# EAGLE board PCB v8 (EAGLE 9.7.0)
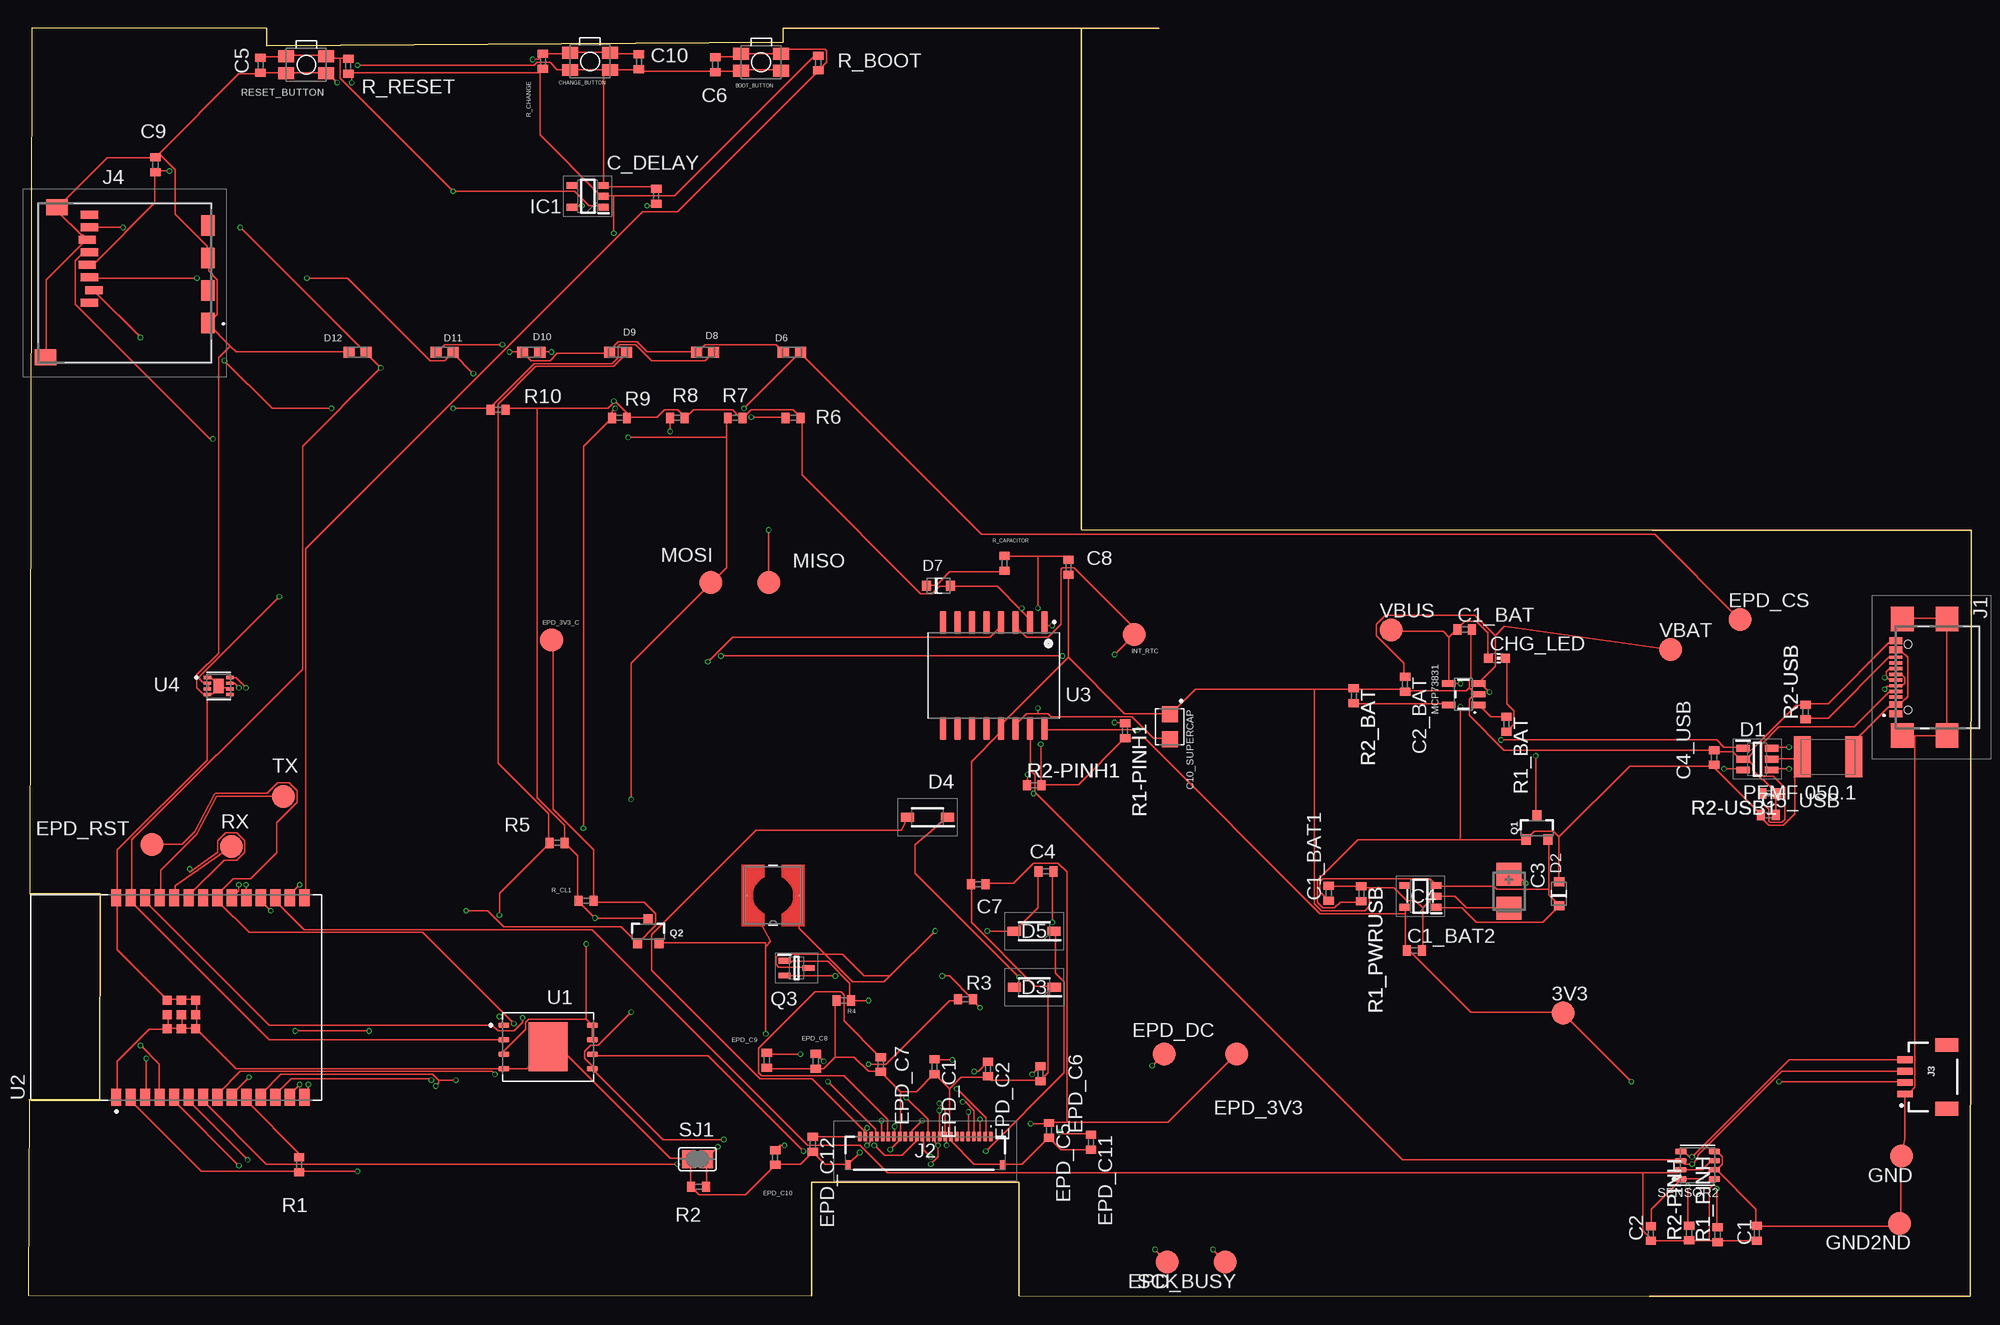
[diagram p0: board, top side]
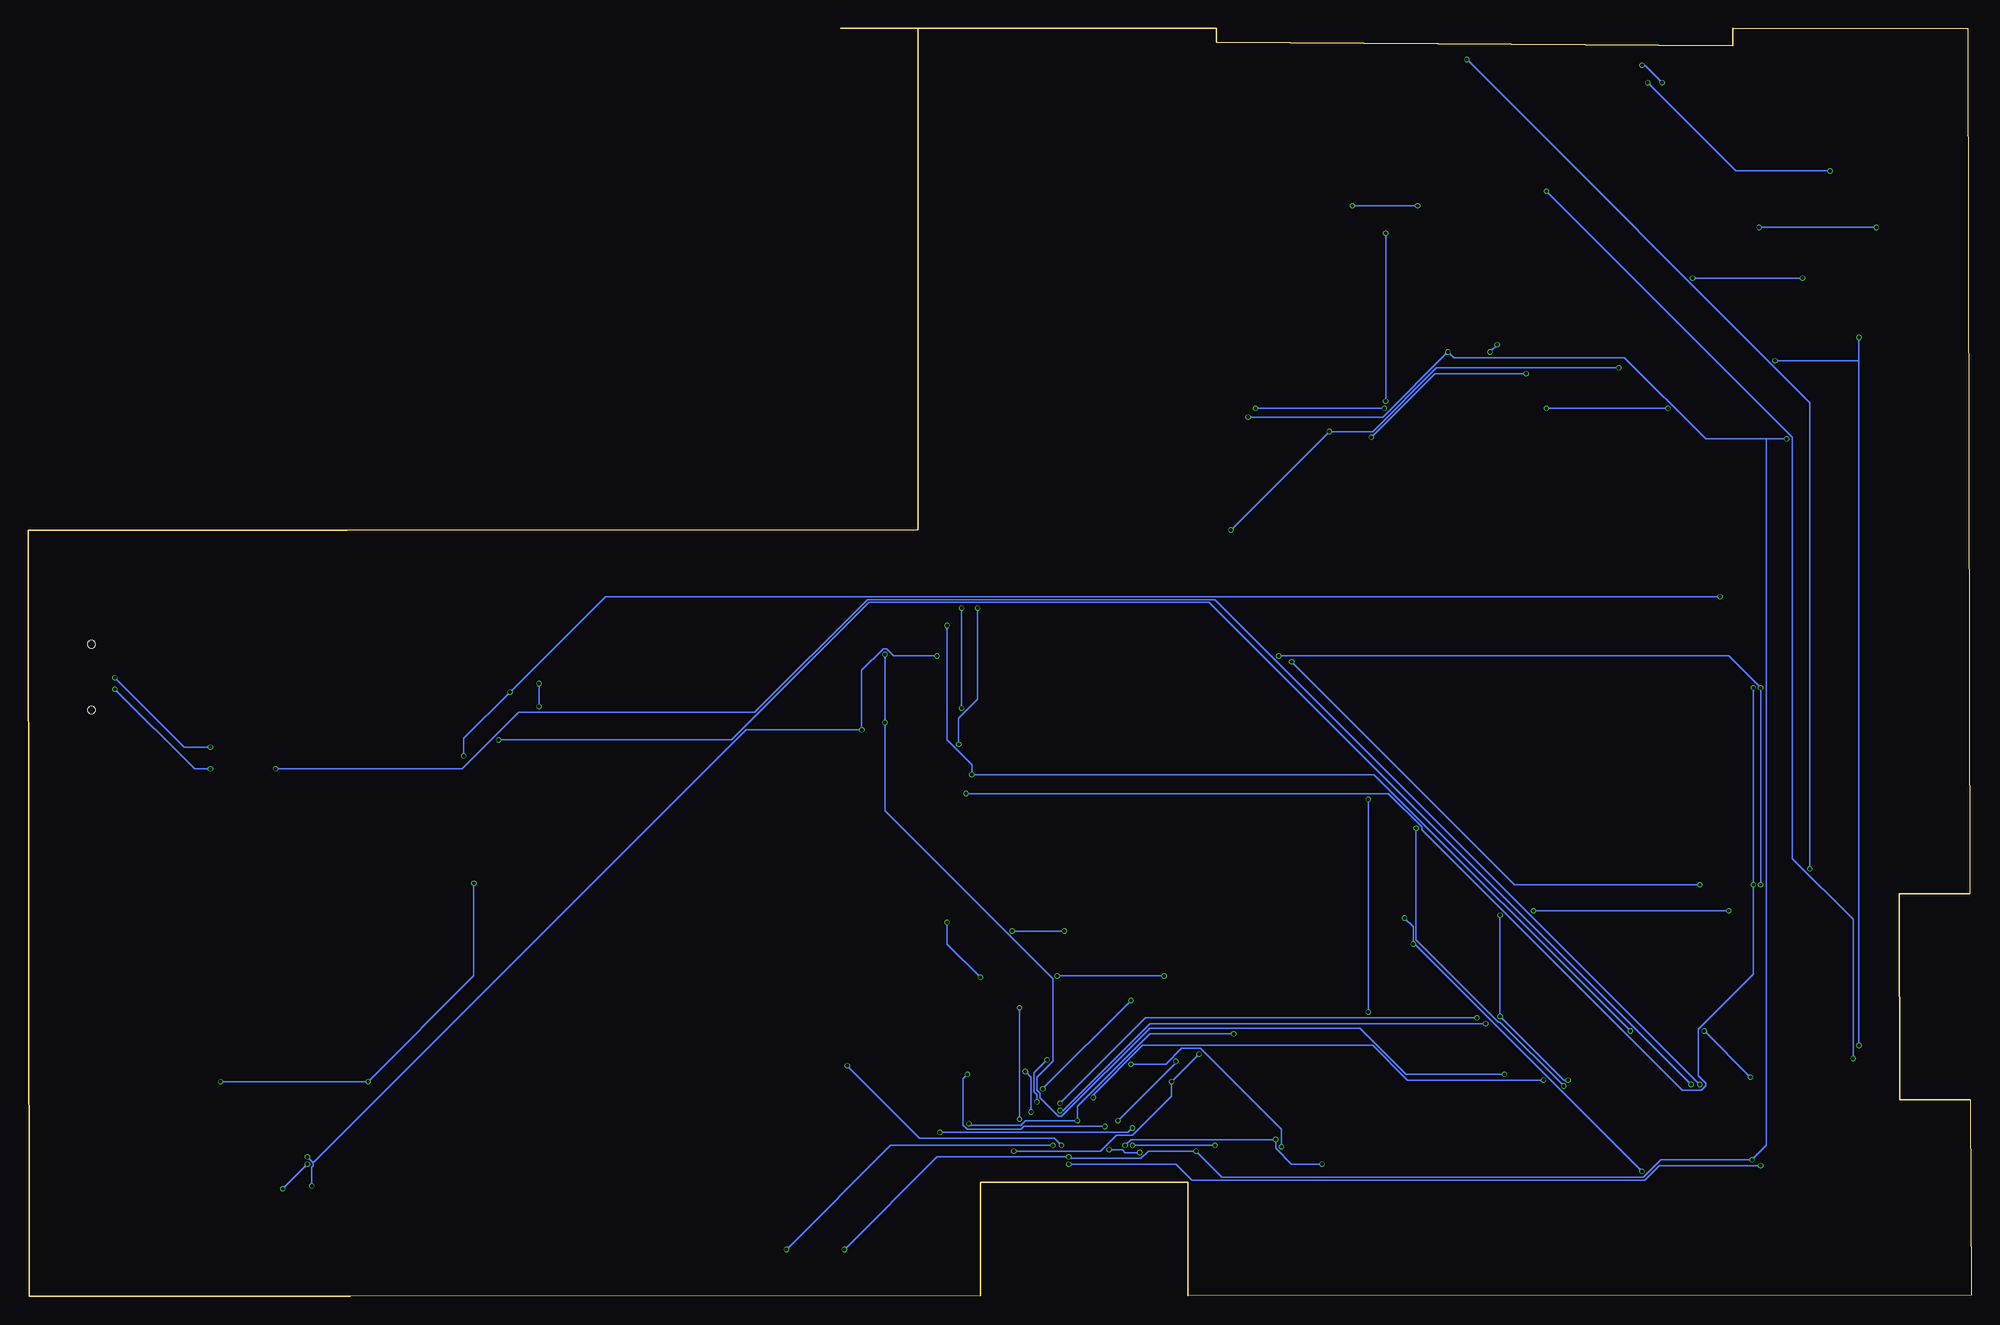
[diagram p1: board, bottom side, seen from below]

Size 170.44 x 111.2 mm. Coordinates in mm from the lower left corner, seen from the top.
Outline: 92.4,111.2 99.2,111.2
Outline: 92.4,111.2 66.2,111.2 66.2,110 20.9,109.7 20.9,111.2 0.3,111.2 0.1,35.31 6.28,35.3 6.23,17.23 0.05,17.25 0,0.1 68.72,0.05 68.72,10.01 69.08,10.01 86.9,10 86.89,0.04 142.2,0 170.39,0 170.44,67.2 142.5,67.17 92.4,67.24 92.4,68.7 92.4,111.2
Copper layers (1*16): Top / Bottom
Stack-up Default Layer Stack: Top User Defined 0.035mm / Dielectric-1 User Defined 1.6mm / Bottom User Defined 0.035mm
Design rules: minimum copper width 5mil, minimum drill size 0.3mm, copper clearance wire_polygon to wire_polygon 5mil, copper clearance wire_polygon to pad_smd 5mil, copper clearance wire_polygon to via 5mil, copper clearance pad_smd to pad_smd 5mil, copper clearance pad_smd to via 5mil, copper clearance via to via 5mil, copper clearance smd to pad (same net) 5mil, copper clearance smd to via (same net) 5mil, copper clearance smd to smd (same net) 5mil, dimension clearance 0.2mm, via restrict clearance 0mil, restrict clearance 0mil, drill distance 6mil, keepout clearance 0mil

## Footprints (pad centres in the part's own frame; a part is rotated, then mirrored left to right if it is on the bottom)
TP20R = smd 2 x 2: TP 0,0
MYBUTTON = smd 1.4 x 1.05: 1 1.75,0.75; 2 -1.75,0.75; 3 -1.75,-0.75; 4 1.75,-0.75
ESP32_WROVER_EAGLE-LTSPICE_C0402 = smd 0.7 x 0.9: 1 -0.65,0; 2 0.65,0
EAGLE-LTSPICE_C0402 = smd 0.7 x 0.9: 1 -0.65,0; 2 0.65,0
RCL_CT3528 = smd 2 x 2.2: + -1.5,0; - 1.5,0
CAPCP3225X100N = smd 1.4 x 1.4: 1 -1.1,0; 2 1.1,0
ADAFRUIT_CHIP-LED0603 = smd 0.8 x 0.8: A 0,-0.75; C 0,0.75
SOT95P280X145-6N = smd 1.2 x 0.6: 1 -1.25,0.95; 2 -1.25,0; 3 -1.25,-0.95; 4 1.25,-0.95; 5 1.25,0; 6 1.25,0.95
ESP32_WROVER_AVX---SD0805S020S1R0_AVX_SD0805S020S1R0_0 = smd 0.8 x 0.9: 1 -1.05,0; 2 1.05,0
SOD3716X135N = smd 1.15 x 0.8: 1 -1.75,0; 2 1.75,0
DIOC1608X36N = smd 0.97 x 0.94: 1 -0.75,0; 2 0.75,0
SOT95P280X125-5N = smd 0.9 x 0.6: 1 -1.4,0.95; 2 -1.4,0; 3 -1.4,-0.95; 4 1.4,-0.95; 5 1.4,0.95
SOT95P280X120-5N = smd 0.9 x 0.6: 1 -1.4,0.95; 2 -1.4,0; 3 -1.4,-0.95; 4 1.4,-0.95; 5 1.4,0.95
SAMACSYS_PARTS_USB4110GFA = smd 0.3 x 1.15: A1 -3.35,3.678; A4 -2.55,3.678; A5 -1.25,3.678; A6 -0.25,3.678; A7 0.25,3.678; A8 1.25,3.678; A9 2.55,3.678; A12 3.35,3.678; B1 3.05,3.678; B4 2.25,3.678; B5 1.75,3.678; B6 0.75,3.678; B7 -0.75,3.678; B8 -1.75,3.678; B9 -2.25,3.678; B12 -3.05,3.678 | smd 2.18 x 2: MP1 -5.11,-0.827; MP2 5.11,-0.827; MP3 -5.11,3.103; MP4 5.11,3.103 | hole 0.65: -2.89,2.603; 2.89,2.603
FH34SRJ24S05SH99 = smd 0.3 x 0.8: 1 5.75,1.45; 2 5.25,1.45; 3 4.75,1.45; 4 4.25,1.45; 5 3.75,1.45; 6 3.25,1.45; 7 2.75,1.45; 8 2.25,1.45; 9 1.75,1.45; 10 1.25,1.45; 11 0.75,1.45; 12 0.25,1.45; 13 -0.25,1.45; 14 -0.75,1.45; 15 -1.25,1.45; 16 -1.75,1.45; 17 -2.25,1.45; 18 -2.75,1.45; 19 -3.25,1.45; 20 -3.75,1.45; 21 -4.25,1.45; 22 -4.75,1.45; 23 -5.25,1.45; 24 -5.75,1.45 | smd 0.4 x 0.8: MP1 6.75,-1.05; MP2 -6.75,-1.05
JST04_1MM_RA = smd 0.6 x 1.35: 1 -1.5,0; 2 -0.5,0; 3 0.5,0; 4 1.5,0 | smd 1.2 x 2: NC1 2.8,-3.675; NC2 -2.8,-3.675
112ATAARR03ATTEND = smd 1.8 x 1.2: G1 10.6,10.4; G2 4.9,10.4; S1 7.75,10.4; S2 2.05,10.4 | smd 1.4 x 1.9: G3 13.6,-3.85; G4 0.45,-2.85 | smd 0.7 x 1.5: P1 8.8,0; P2 7.7,0.4; P3 6.6,0; P4 5.5,-0.2; P5 4.4,0; P6 3.3,-0.2; P7 2.2,0; P8 1.1,0
IND_4828-WE-TPC_WRE = smd 0.127 x 0.127: 1 -2.286,0; 2 2.286,0
ESP32_WROVER_SPARKFUN-IC-POWER_SOT23-5 = smd 0.55 x 1.2: 1 -0.95,-1.3; 2 0,-1.3; 3 0.95,-1.3; 4 0.95,1.3; 5 -0.95,1.3
ESP32C6_VARISTOR_CT/CN1812 = smd 1.5 x 3.6: 1 -2.25,0; 2 2.25,0
ESP32_WROVER_SPARKFUN-DISCRETESEMI_SOT23-3 = smd 0.8 x 0.9: 1 -0.95,-1; 2 0.95,-1; 3 0,1.1
SOT65P210X110-3N = smd 1.05 x 0.5: 1 -1.05,0.65; 2 -1.05,-0.65; 3 1.05,0
ESP32_WROVER_EAGLE-LTSPICE_R0402 = smd 0.7 x 0.9: 1 -0.65,0; 2 0.65,0
ESP32_WROVER_BME680_PSON80P300X300X100-8N = smd 1.016 x 0.5: 1 1.458,1.2; 2 1.458,0.4; 3 1.458,-0.4; 4 1.458,-1.2; 5 -1.458,-1.22; 6 -1.458,-0.4; 7 -1.458,0.4; 8 -1.458,1.2
SJ = smd 1.168 x 1.6: 1 -0.762,0; 2 0.762,0
SON127P600X800X80-9N = smd 0.94 x 0.44: 1 -3.895,1.905; 2 -3.895,0.635; 3 -3.895,-0.635; 4 -3.895,-1.905; 5 3.895,-1.905; 6 3.895,-0.635; 7 3.895,0.635; 8 3.895,1.905 | smd 3.4 x 4.3: 9 0,0
XCVR_ESP32-C6-WROOM-1-N8 = smd 1.5 x 0.9: 1 -8.75,5.26; 2 -8.75,3.99; 3 -8.75,2.72; 4 -8.75,1.45; 5 -8.75,0.18; 6 -8.75,-1.09; 7 -8.75,-2.36; 8 -8.75,-3.63; 9 -8.75,-4.9; 10 -8.75,-6.17; 11 -8.75,-7.44; 12 -8.75,-8.71; 13 -8.75,-9.98; 14 -8.75,-11.25; 15 8.75,-11.25; 16 8.75,-9.98; 17 8.75,-8.71; 18 8.75,-7.44; 19 8.75,-6.17; 20 8.75,-4.9; 21 8.75,-3.63; 22 8.75,-2.36; 23 8.75,-1.09; 24 8.75,0.18; 25 8.75,1.45; 26 8.75,2.72; 27 8.75,3.99; 28 8.75,5.26 | smd 0.8 x 0.8: 29_1 -2.755,0.79; 29_2 -1.505,0.79; 29_3 -0.255,0.79; 29_4 -2.755,-0.46; 29_5 -1.505,-0.46; 29_6 -0.255,-0.46; 29_7 -2.755,-1.71; 29_8 -1.505,-1.71; 29_9 -0.255,-1.71
SOIC127P1032X265-16N = smd 2.05 x 0.59: 1 -4.655,4.445; 2 -4.655,3.175; 3 -4.655,1.905; 4 -4.655,0.635; 5 -4.655,-0.635; 6 -4.655,-1.905; 7 -4.655,-3.175; 8 -4.655,-4.445; 9 4.655,-4.445; 10 4.655,-3.175; 11 4.655,-1.905; 12 4.655,-0.635; 13 4.655,0.635; 14 4.655,1.905; 15 4.655,3.175; 16 4.655,4.445
SON50P200X200X80-9N = smd 0.76 x 0.27: 1 -0.985,0.75; 2 -0.985,0.25; 3 -0.985,-0.25; 4 -0.985,-0.75; 5 0.985,-0.75; 6 0.985,-0.25; 7 0.985,0.25; 8 0.985,0.75 | smd 0.9 x 1.3: 9 0,0

## Placement (x,y rotation side)
3V3  TPTP20R  [TP20R]  134.65,24.84 0 top
BOOT_BUTTON  BUTTON_CUSYOMV1  [MYBUTTON]  64.29,108.23 180 top
C1  100nF  [ESP32_WROVER_EAGLE-LTSPICE_C0402]  151.64,5.52 90 top
C1_BAT  4.7uF  [EAGLE-LTSPICE_C0402]  126.01,58.48 0 top
C1_BAT1  4.7uF  [ESP32_WROVER_EAGLE-LTSPICE_C0402]  114.08,35.35 90 top
C1_BAT2  4.7uF  [ESP32_WROVER_EAGLE-LTSPICE_C0402]  121.59,30.32 0 top
C2  100nF  [ESP32_WROVER_EAGLE-LTSPICE_C0402]  142.34,5.5 90 top
C2_BAT  4.7uF  [EAGLE-LTSPICE_C0402]  120.78,53.68 270 top
C3  100uF TANT  [RCL_CT3528]  129.9,35.52 270 top
C4  4.7uF/25V  [ESP32_WROVER_EAGLE-LTSPICE_C0402]  89.28,37.26 180 top
C4_USB  100nf  [EAGLE-LTSPICE_C0402]  147.9,47.25 90 top
C5  1uF  [EAGLE-LTSPICE_C0402]  20.36,107.98 270 top
C5_USB  4.7uF  [EAGLE-LTSPICE_C0402]  152.66,42.2 0 top
C6  100nF  [EAGLE-LTSPICE_C0402]  60.26,108.02 270 top
C7  10uF  [ESP32_WROVER_EAGLE-LTSPICE_C0402]  83.33,36.14 180 top
C8  100nF  [EAGLE-LTSPICE_C0402]  91.26,63.94 270 top
C9  100nF  [EAGLE-LTSPICE_C0402]  11.14,99.24 90 top
C10  100nF  [EAGLE-LTSPICE_C0402]  53.56,108.28 270 top
C10_SUPERCAP  CPH3225A  [CAPCP3225X100N]  100.14,49.95 270 top
C_DELAY  100nF  [EAGLE-LTSPICE_C0402]  55.08,96.49 90 top
CHANGE_BUTTON  BUTTON_CUSYOMV1  [MYBUTTON]  49.27,108.31 180 top
CHG_LED  [ADAFRUIT_CHIP-LED0603]  128.85,55.96 270 top
D1  USBLC6-2SC6Y  [SOT95P280X145-6N]  151.68,47.1 0 top
D2  SD0805S020S1R0  [ESP32_WROVER_AVX---SD0805S020S1R0_AVX_SD0805S020S1R0_0]  134.29,35.29 90 top
D3  MBR0530  [SOD3716X135N]  88.25,27.1 180 top
D4  MBR0530  [SOD3716X135N]  78.88,42.02 180 top
D5  MBR0530  [SOD3716X135N]  88.24,32.02 180 top
D6  PGB1010603MR  [DIOC1608X36N]  66.98,82.8 0 top
D7  ESP32_WROVER_AVX---SD0805S020S1R0_AVX_SD0805S020S1R0_0_0AVX_SD0805S020S1R0_0_0  [ESP32_WROVER_AVX---SD0805S020S1R0_AVX_SD0805S020S1R0_0]  79.84,62.31 0 top
D8  PGB1010603MR  [DIOC1608X36N]  59.36,82.8 0 top
D9  PGB1010603MR  [DIOC1608X36N]  51.74,82.8 0 top
D10  PGB1010603MR  [DIOC1608X36N]  44.12,82.8 0 top
D11  PGB1010603MR  [DIOC1608X36N]  36.5,82.8 0 top
D12  PGB1010603MR  [DIOC1608X36N]  28.88,82.8 0 top
EPD_3V3  TPTP20R  [TP20R]  106,21.24 0 top
EPD_3V3_C  TPTP20R  [TP20R]  45.9,57.54 0 top
EPD_BUSY  TPTP20R  [TP20R]  104.99,2.98 180 top
EPD_C1  1uF/50V  [EAGLE-LTSPICE_C0402]  79.5,20.13 270 top
EPD_C2  1uF/50V  [EAGLE-LTSPICE_C0402]  84.2,19.92 270 top
EPD_C5  0.1uF/50V  [EAGLE-LTSPICE_C0402]  89.54,14.54 270 top
EPD_C6  1uF/50V  [EAGLE-LTSPICE_C0402]  88.8,19.51 270 top
EPD_C7  1uF/50V  [EAGLE-LTSPICE_C0402]  74.78,20.32 270 top
EPD_C8  1uF/50V  [EAGLE-LTSPICE_C0402]  69.08,20.61 270 top
EPD_C9  1uF/50V  [EAGLE-LTSPICE_C0402]  64.78,20.7 270 top
EPD_C10  1uF/50V  [EAGLE-LTSPICE_C0402]  65.52,12.17 270 top
EPD_C11  1uF/50V  [EAGLE-LTSPICE_C0402]  93.22,13.49 270 top
EPD_C12  1uF/50V  [EAGLE-LTSPICE_C0402]  68.82,13.33 270 top
EPD_CS  TPTP20R  [TP20R]  150.17,59.34 0 top
EPD_DC  TPTP20R  [TP20R]  99.65,21.24 0 top
EPD_RST  TPTP20R  [TP20R]  10.85,39.64 0 top
GND  TPTP20R  [TP20R]  164.33,12.28 180 top
GND2ND  TPTP20R  [TP20R]  164.17,6.38 180 top
IC1  BD5229G-TR  [SOT95P280X125-5N]  49.07,96.48 180 top
IC4  XC6220A331MR-G  [SOT95P280X120-5N]  122.13,35.08 180 top
INT_RTC  TPTP20R  [TP20R]  97,58.04 0 top
J1  SAMACSYS_PARTS_USB4110-GF-A  [SAMACSYS_PARTS_USB4110GFA]  167.51,54.29 90 top
J2  FH34SRJ-24S-0.5SH_99_  [FH34SRJ24S05SH99]  78.69,12.55 0 top
J3  QWIIC_RIGHT_ANGLE  [JST04_1MM_RA]  164.64,19.24 90 top
J4  112A-TAAR-R03_ATTEND  [112ATAARR03ATTEND]  5.35,95.96 270 top
L1  [IND_4828-WE-TPC_WRE]  65.33,35.15 180 top
MCP73831  MCP73831  [ESP32_WROVER_SPARKFUN-IC-POWER_SOT23-5]  125.91,52.8 90 top
MISO  TPTP20R  [TP20R]  64.95,62.62 0 top
MOSI  TPTP20R  [TP20R]  59.87,62.62 0 top
PFMF.050.1  PFMF.050.1  [ESP32C6_VARISTOR_CT/CN1812]  157.89,47.3 180 top
Q1  20V/4.2A/52mΩ/1.4W  [ESP32_WROVER_SPARKFUN-DISCRETESEMI_SOT23-3]  132.36,41.06 0 top
Q2  20V/4.2A/52mΩ/1.4W  [ESP32_WROVER_SPARKFUN-DISCRETESEMI_SOT23-3]  54.38,31.96 0 top
Q3  SI1308EDL-T1-GE3  [SOT65P210X110-3N]  67.39,28.78 0 top
R1  10K  [ESP32_WROVER_EAGLE-LTSPICE_R0402]  23.74,11.53 90 top
R1-PINH1  10k  [ESP32_WROVER_EAGLE-LTSPICE_R0402]  96.22,49.59 270 top
R1_BAT  200  [ESP32_WROVER_EAGLE-LTSPICE_R0402]  129.68,50.17 270 top
R1_PINH  10K  [ESP32_WROVER_EAGLE-LTSPICE_R0402]  148.2,5.38 90 top
R1_PWRUSB  100k  [ESP32_WROVER_EAGLE-LTSPICE_R0402]  116.94,35.29 270 top
R2  2.2  [ESP32_WROVER_EAGLE-LTSPICE_R0402]  58.8,9.6 180 top
R2-PINH  10k  [ESP32_WROVER_EAGLE-LTSPICE_R0402]  145.7,5.54 90 top
R2-PINH1  10k  [ESP32_WROVER_EAGLE-LTSPICE_R0402]  88.25,44.82 0 top
R2-USB  5K1  [ESP32_WROVER_EAGLE-LTSPICE_R0402]  155.92,51.25 90 top
R2-USB1  5K1  [ESP32_WROVER_EAGLE-LTSPICE_R0402]  152.78,44.1 180 top
R2_BAT  2K  [ESP32_WROVER_EAGLE-LTSPICE_R0402]  116.28,52.66 270 top
R3  0.47  [ESP32_WROVER_EAGLE-LTSPICE_R0402]  82.21,26.04 180 top
R4  10k  [ESP32_WROVER_EAGLE-LTSPICE_R0402]  71.53,25.94 180 top
R5  10k  [ESP32_WROVER_EAGLE-LTSPICE_R0402]  46.39,39.76 0 top
R6  10k  [ESP32_WROVER_EAGLE-LTSPICE_R0402]  67.09,77.04 0 top
R7  10k  [ESP32_WROVER_EAGLE-LTSPICE_R0402]  62.01,77.04 0 top
R8  10k  [ESP32_WROVER_EAGLE-LTSPICE_R0402]  56.93,77.04 0 top
R9  10k  [ESP32_WROVER_EAGLE-LTSPICE_R0402]  51.85,77.04 0 top
R10  10k  [ESP32_WROVER_EAGLE-LTSPICE_R0402]  41.21,77.76 0 top
R_BOOT  10k  [ESP32_WROVER_EAGLE-LTSPICE_R0402]  69.3,108.17 270 top
R_CAPACITOR  15  [ESP32_WROVER_EAGLE-LTSPICE_R0402]  85.64,64.29 270 top
R_CHANGE  10k  [ESP32_WROVER_EAGLE-LTSPICE_R0402]  45.14,108.32 270 top
R_CL1  10k  [ESP32_WROVER_EAGLE-LTSPICE_R0402]  48.93,34.68 0 top
R_RESET  10k  [ESP32_WROVER_EAGLE-LTSPICE_R0402]  28.06,107.9 90 top
RESET_BUTTON  BUTTON_CUSYOMV1  [MYBUTTON]  24.38,108.01 180 top
RX  TPTP20R  [TP20R]  17.79,39.44 0 top
SCK  TPTP20R  [TP20R]  99.91,2.98 180 top
SENSOR2  ESP32_WROVER_BME680_BME680  [ESP32_WROVER_BME680_PSON80P300X300X100-8N]  146.45,11.48 180 top
SJ1  [SJ]  58.7,12.02 0 top
TX  TPTP20R  [TP20R]  22.37,43.84 0 top
U1  W25Q512JVEIQ  [SON127P600X800X80-9N]  45.59,21.86 0 top
U2  ESP32-C6-WROOM-1-N8  [XCVR_ESP32-C6-WROOM-1-N8]  12.96,26.2 90 top
U3  DS3231SN#  [SOIC127P1032X265-16N]  84.7,54.45 270 top
U4  MAX17048G+T10  [SON50P200X200X80-9N]  16.69,53.52 0 top
VBAT  TPTP20R  [TP20R]  144.09,56.72 0 top
VBUS  TPTP20R  [TP20R]  119.55,58.44 0 top

## Library data of the parts
3V3 BOOT_BUTTON CHANGE_BUTTON CHG_LED EPD_3V3 EPD_3V3_C EPD_BUSY EPD_CS EPD_DC EPD_RST GND GND2ND INT_RTC MISO MOSI PFMF.050.1 RESET_BUTTON RX SCK SJ1 TX VBAT VBUS = DeskAssistant v19 v1
C1 C1_BAT C1_BAT1 C1_BAT2 C2 C2_BAT C4 C4_USB C5 C5_USB C6-C10 C_DELAY EPD_C1 EPD_C2 EPD_C5-EPD_C12 = DeskAssistant v19 v1; SPICEMODEL: NONE; SPICEPREFIX: C
C3 = DeskAssistant v19 v1; SPICEPREFIX: C
C10_SUPERCAP = DeskAssistant v19 v1; AVAILABILITY: Not in stock; CHECK_PRICES: https://www.snapeda.com/parts/CPH3225A/Seiko+Instruments/view-part/?ref=eda; DESCRIPTION: 11 mF (EDLC) Supercapacitor 3.3 V 1210 (3225 Metric) - -; MF: Seiko Instruments; MP: CPH3225A; PACKAGE: 1210 Seiko; PRICE: None; PURCHASE-URL: https://www.snapeda.com/api/url_track_click_mouser/?unipart_id=562593&manufacturer=Seiko Instruments&part_name=CPH3225A&search_term=None; SNAPEDA_LINK: https://www.snapeda.com/parts/CPH3225A/Seiko+Instruments/view-part/?ref=snap
D1 = DeskAssistant v19 v1; AVAILABILITY: In Stock; CHECK_PRICES: https://www.snapeda.com/parts/USBLC6-2SC6Y/STMicroelectronics/view-part/?ref=eda; DESCRIPTION: 17V Clamp 5A (8/20µs) Ipp Tvs Diode Surface Mount SOT-23-6; MF: STMicroelectronics; MP: USBLC6-2SC6Y; PACKAGE: SOT-23-6 STMicroelectronics; PRICE: None; SNAPEDA_LINK: https://www.snapeda.com/parts/USBLC6-2SC6Y/STMicroelectronics/view-part/?ref=snap
D2 D7 = DeskAssistant v19 v1; CENTROID_NOT_SPECIFIED: No; DATASHEET: http://datasheets.avx.com/schottky.pdf; DIGIKEY_DESCRIPTION: DIODE SCHOTTKY 20V 1A 0805; DIGIKEY_PART_NUMBER: 478-7800-1-ND; LEAD_FREE: yes; MF: AVX; MOUSER_PART_NUMBER: 581-SD0805S020S1R0; PACKAGE: 0805 (2012 metric); PREFIX: D; ROHS: yes; TEMPERATURE_RANGE_HIGH: +125°C; TEMPERATURE_RANGE_LOW: -55°C
D3-D5 = DeskAssistant v19 v1; AVAILABILITY: In Stock; CHECK_PRICES: https://www.snapeda.com/parts/MBR0530/Onsemi/view-part/?ref=eda; DESCRIPTION: Diode Schottky 30 V 500mA Surface Mount SOD-123; MF: ON Semiconductor; MP: MBR0530; PACKAGE: SOD-123-2 ON Semiconductor; PRICE: None; PURCHASE-URL: https://www.snapeda.com/api/url_track_click_mouser/?unipart_id=179458&manufacturer=ON Semiconductor&part_name=MBR0530&search_term=None; SNAPEDA_LINK: https://www.snapeda.com/parts/MBR0530/Onsemi/view-part/?ref=snap
D6 D8-D12 = DeskAssistant v19 v1; AVAILABILITY: In Stock; CHECK_PRICES: https://www.snapeda.com/parts/PGB1010603MR/Littelfuse/view-part/?ref=eda; DESCRIPTION: 150V (Typ) Clamp - Ipp Tvs Diode Surface Mount 0603 (1608 Metric); MF: Littelfuse Inc.; MP: PGB1010603MR; PACKAGE: 0603 Littelfuse Inc.; PRICE: None; PURCHASE-URL: https://www.snapeda.com/api/url_track_click_mouser/?unipart_id=5659453&manufacturer=Littelfuse Inc.&part_name=PGB1010603MR&search_term=None; SNAPEDA_LINK: https://www.snapeda.com/parts/PGB1010603MR/Littelfuse/view-part/?ref=snap
IC1 = DeskAssistant v19 v1; DESCRIPTION: Voltage Detector with Adjustable Delay Time: CMOS processes are utilized to develop high precision, low current consumption CMOS reset ICs that allow arbitrary setting of the delay time. The extensive lineup includes both Nch Open Drain and CMOS output types in a wide range of detection voltages (from 2.3V to 6.0V, in 0.1V steps), enabling selection of the ideal solution based on customer requirements. In addition, the entire series is of course both lead-free and RoHS-compliant.; HEIGHT: 1.25mm; MANUFACTURER_NAME: ROHM Semiconductor; MANUFACTURER_PART_NUMBER: BD5229G-TR; MOUSER_PART_NUMBER: 755-BD5229G-TR; MOUSER_PRICE-STOCK: https://www.mouser.co.uk/ProductDetail/ROHM-Semiconductor/BD5229G-TR?qs=4kLU8WoGk0vvnhrrYwdszw%3D%3D
IC4 = DeskAssistant v19 v1; DESCRIPTION: LDO Voltage Regulators; HEIGHT: 1.2mm; MANUFACTURER_NAME: Torex; MANUFACTURER_PART_NUMBER: XC6220A331MR-G; MOUSER_PART_NUMBER: 865-XC6220A331MR-G; MOUSER_PRICE-STOCK: https://www.mouser.co.uk/ProductDetail/Torex-Semiconductor/XC6220A331MR-G?qs=AsjdqWjXhJ8ZSWznL1J0gg%3D%3D
J1 = DeskAssistant v19 v1; DESCRIPTION: CONN USB 2.0 TYPE-C R/A SMT; HEIGHT: 3.26mm; MANUFACTURER_NAME: GCT (GLOBAL CONNECTOR TECHNOLOGY); MANUFACTURER_PART_NUMBER: USB4110-GF-A; MOUSER_PART_NUMBER: 640-USB4110-GF-A; MOUSER_PRICE-STOCK: https://www.mouser.co.uk/ProductDetail/GCT/USB4110-GF-A?qs=KUoIvG%2F9IlYiZvIXQjyJeA%3D%3D
J2 = DeskAssistant v19 v1; DESCRIPTION: 24 Position FFC, FPC Connector Contacts, Top and Bottom 0.020" (0.50mm) Surface Mount, Right Angle; HEIGHT: 1.1mm; MANUFACTURER_NAME: Hirose; MANUFACTURER_PART_NUMBER: FH34SRJ-24S-0.5SH(99); MOUSER_PART_NUMBER: 798-FH34SRJ24S05SH99; MOUSER_PRICE-STOCK: https://www.mouser.co.uk/ProductDetail/Hirose-Connector/FH34SRJ-24S-0.5SH99?qs=vcbW%252B4%252BSTIpKBl5ap9J8Fw%3D%3D
J3 = DeskAssistant v19 v1; PROD_ID: CONN-13694
J4 = DeskAssistant v19 v1; DESCRIPTION: Micro SD Card Socket, Push-Push Type, Top Mount, SMT, H=1.83mm, 10u; HEIGHT: 1.9mm; MANUFACTURER_NAME: ATTEND; MANUFACTURER_PART_NUMBER: 112A-TAAR-R03 ATTEND
L1 = DeskAssistant v19 v1; COPYRIGHT: Copyright (C) 2024 Ultra Librarian. All rights reserved.; MANUFACTURER_PART_NUMBER: 744043680; MFR_NAME: Wurth Electronics
MCP73831 = DeskAssistant v19 v1; PROD_ID: IC-09995
Q1 Q2 = DeskAssistant v19 v1; PROD_ID: TRAN-14388
Q3 = DeskAssistant v19 v1; AVAILABILITY: In Stock; CHECK_PRICES: https://www.snapeda.com/parts/SI1308EDL-T1-GE3/Vishay+Siliconix/view-part/?ref=eda; DESCRIPTION: Si1308EDL-T1-GE3 N-channel MOSFET Transistor, 1.5 A, 30 V, 3-Pin SC-70 | Siliconix / Vishay SI1308EDL-T1-GE3; MF: Vishay Siliconix; MP: SI1308EDL-T1-GE3; PACKAGE: SOT-323 Vishay Semiconductor; PRICE: None; PURCHASE-URL: https://www.snapeda.com/api/url_track_click_mouser/?unipart_id=274603&manufacturer=Vishay Siliconix&part_name=SI1308EDL-T1-GE3&search_term=None; SNAPEDA_LINK: https://www.snapeda.com/parts/SI1308EDL-T1-GE3/Vishay+Siliconix/view-part/?ref=snap
R1 R1-PINH1 R1_BAT R1_PINH R1_PWRUSB R2 R2-PINH R2-PINH1 R2-USB R2-USB1 R2_BAT R3-R10 R_BOOT R_CAPACITOR R_CHANGE R_CL1 R_RESET = DeskAssistant v19 v1; SPICEMODEL: NONE; SPICEPREFIX: R
SENSOR2 = DeskAssistant v19 v1; AVAILABILITY: Unavailable; DESCRIPTION: Integrated Environmental Unit; MF: Bosch Sensortec; MP: BME680; PACKAGE: LGA-8 Bosch Tools; PRICE: None
U1 = DeskAssistant v19 v1; AVAILABILITY: In Stock; CHECK_PRICES: https://www.snapeda.com/parts/W25Q512JVEIQ/Winbond+Electronics/view-part/?ref=eda; DESCRIPTION: FLASH - NOR Memory IC 512Mb (64M x 8) SPI - Quad I/O 133 MHz 8-WSON (8x6); MF: Winbond Electronics; MP: W25Q512JVEIQ; PACKAGE: Package; PRICE: None; SNAPEDA_LINK: https://www.snapeda.com/parts/W25Q512JVEIQ/Winbond+Electronics/view-part/?ref=snap
U2 = DeskAssistant v19 v1; AVAILABILITY: In Stock; CHECK_PRICES: https://www.snapeda.com/parts/ESP32-C6-WROOM-1-N8/Espressif+Systems/view-part/?ref=eda; DESCRIPTION: Multiprotocol Modules ESP32-C6 module, Wi-Fi 6 in 2.4 GHz band, Bluetooth 5, Zigbee 3.0 and Thread. ESP34-WROOM Compatible - ENGINEERING SAMPLE; MF: Espressif Systems; MP: ESP32-C6-WROOM-1-N8; PACKAGE: None; PRICE: None; SNAPEDA_LINK: https://www.snapeda.com/parts/ESP32-C6-WROOM-1-N8/Espressif+Systems/view-part/?ref=snap
U3 = DeskAssistant v19 v1; AVAILABILITY: In Stock; CHECK_PRICES: https://www.snapeda.com/parts/DS3231SN%23/Analog+Devices/view-part/?ref=eda; DESCRIPTION: Extremely Accurate I²C-Integrated RTC/TCXO/Crystal; MF: Analog Devices; MP: DS3231SN#; PACKAGE: SOIC-16 Maxim; PRICE: None; PURCHASE-URL: https://www.snapeda.com/api/url_track_click_mouser/?unipart_id=99048&manufacturer=Analog Devices&part_name=DS3231SN#&search_term=None; SNAPEDA_LINK: https://www.snapeda.com/parts/DS3231SN%23/Analog+Devices/view-part/?ref=snap
U4 = DeskAssistant v19 v1; AVAILABILITY: In Stock; CHECK_PRICES: https://www.snapeda.com/parts/MAX17048G+T10/Analog+Devices/view-part/?ref=eda; DESCRIPTION: 3µA 1-Cell/2-Cell Fuel Gauge with ModelGauge; MF: Analog Devices; MP: MAX17048G+T10; PACKAGE: TDFN-8 Maxim; PRICE: None; PURCHASE-URL: https://www.snapeda.com/api/url_track_click_mouser/?unipart_id=329239&manufacturer=Analog Devices&part_name=MAX17048G+T10&search_term=None; SNAPEDA_LINK: https://www.snapeda.com/parts/MAX17048G+T10/Analog+Devices/view-part/?ref=snap

## Nets
3V3: 3V3.TP C1_BAT2.1 C3.+ C9.1 D7.2 IC1.2 IC4.5 J3.2 J4.P4 Q2.3 R1-PINH1.2 R1.1 R2-PINH1.2 R5.2 R6.2 R7.2 R8.2 R9.2 R10.2 R_BOOT.1 R_CHANGE.2 R_CL1.1 R_RESET.1 U1.3 U1.7 U1.8 U2.2 U3.2
32KHZ: R2-PINH1.1 U2.9 U3.1
DN: D1.4 J1.A7 J1.B7
DP: D1.6 J1.A6 J1.B6
EPD_3V3: C7.1 EPD_3V3.TP EPD_C5.1 J2.15 J2.16 L1.2 Q2.2
EPD_3V3_C: EPD_3V3_C.TP Q2.1 R_CL1.2 U2.18
EPD_BUSY: EPD_BUSY.TP J2.9 U2.26
EPD_CS: D6.2 EPD_CS.TP J2.12 R9.1 U2.11
EPD_DC: EPD_DC.TP J2.11 U2.5
EPD_RST: EPD_RST.TP J2.10 U2.21
FLASH_CS: D9.2 R5.1 U1.1 U2.12
GDR: J2.2 Q3.1 R4.1
GND: BOOT_BUTTON.1 BOOT_BUTTON.2 C1.2 C1_BAT1.2 C1_BAT2.2 C1_BAT.2 C2.2 C2_BAT.2 C3.- C4_USB.2 C5.2 C5_USB.2 C6.2 C7.2 C8.2 C9.2 C10.2 C10_SUPERCAP.1 C_DELAY.2 CHANGE_BUTTON.1 CHANGE_BUTTON.2 D1.2 D3.1 D12.1 EPD_C1.2 EPD_C2.2 EPD_C5.2 EPD_C6.2 EPD_C7.2 EPD_C8.2 EPD_C9.2 EPD_C10.2 EPD_C11.2 EPD_C12.2 GND2ND.TP GND.TP IC1.3 IC4.2 J1.A1 J1.A12 J1.B1 J1.B12 J1.MP1 J1.MP2 J1.MP3 J1.MP4 J2.8 J2.17 J2.MP1 J2.MP2 J3.1 J4.G1 J4.G2 J4.G3 J4.G4 J4.P6 MCP73831.2 R1_PWRUSB.1 R2-USB1.1 R2-USB.2 R2.2 R2_BAT.1 R4.2 RESET_BUTTON.1 RESET_BUTTON.2 SENSOR2.1 SENSOR2.5 SENSOR2.7 SJ1.1 U1.4 U1.9 U2.1 U2.28 U2.29_1 U2.29_2 U2.29_3 U2.29_4 U2.29_5 U2.29_6 U2.29_7 U2.29_8 U2.29_9 U3.13 U4.1 U4.4 U4.6 U4.9
GPIO8: R1.2 U2.10
I2C_PW: C1.1 C2.1 R1_PINH.1 R2-PINH.1 SENSOR2.2 SENSOR2.6 SENSOR2.8 U2.17
INT_RTC: INT_RTC.TP R1-PINH1.1 U2.8 U3.3
IO/BOOT: BOOT_BUTTON.3 BOOT_BUTTON.4 C6.1 R_BOOT.2 U2.15
IO/CHANGE: C10.1 CHANGE_BUTTON.3 CHANGE_BUTTON.4 R_CHANGE.1 U2.23
MISO: D12.2 J4.P7 MISO.TP R8.1 U1.2 U2.27
MOSI: D11.2 J2.14 J4.P3 MOSI.TP R7.1 U1.5 U2.7
N$1: C_DELAY.1 IC1.5
N$3: C1_BAT1.1 D2.1 IC4.1 IC4.3 Q1.2
N$4: D6.1 D8.1 D9.1 D10.1 D11.1
N$6: J1.A5 R2-USB1.2
N$8: J1.B5 R2-USB.1
N$15: EPD_C1.1 J2.4
N$16: D7.1 R_CAPACITOR.2
N$19: EPD_C2.1 J2.5
N$28: EPD_C6.1 J2.18
N$29: EPD_C8.1 J2.20
N$30: EPD_C7.1 J2.19
N$32: EPD_C10.1 J2.22
N$34: EPD_C12.1 J2.24
N$35: C4.1 D3.2 D4.1
N$36: CHG_LED.C R1_BAT.2
N$37: MCP73831.1 R1_BAT.1
N$38: MCP73831.5 R2_BAT.2
PREVGH: D5.1 EPD_C9.1 J2.21
PREVGL: D4.2 EPD_C11.1 J2.23
RESE: J2.3 Q3.2 R3.1
RESE': R2.1 R3.2 SJ1.2
RESET: C5.1 IC1.1 R_RESET.2 RESET_BUTTON.3 RESET_BUTTON.4 U2.3
RTC_RST: U2.16 U3.4
RX: RX.TP U2.24
SCK: D10.2 J2.13 J4.P5 R6.1 SCK.TP U1.6 U2.6
SCL: J3.4 R2-PINH.2 SENSOR2.4 U2.20 U3.16 U4.7
SDA: J3.3 R1_PINH.2 SENSOR2.3 U2.19 U3.15 U4.8
SRC: C4.2 D5.2 L1.1 Q3.3
SS_SD: D8.2 J4.P2 R10.1 U2.4
TX: TX.TP U2.25
USB_D+: D1.1 U2.14
USB_D-: D1.3 U2.13
VBAT: C2_BAT.1 MCP73831.3 Q1.3 U4.2 U4.3 VBAT.TP
VBUS: C1_BAT.1 C4_USB.1 C5_USB.1 CHG_LED.A D1.5 D2.2 MCP73831.4 PFMF.050.1.2 Q1.1 R1_PWRUSB.2 VBUS.TP
VRTC: C8.1 C10_SUPERCAP.2 R_CAPACITOR.1 U3.14
VUSB: J1.A4 J1.A9 J1.B4 J1.B9 PFMF.050.1.1

## Tracks (layer width: path | path; a pad name or v marks a point on that pad's centre or on a via)
3V3  (via drill 0.3)
  Top 0.127: 120.82,33.55 120.82,34.06 IC4.5 | 120.82,33.55 120.82,30.38 C1_BAT2.1 120.95,30.25 121.2,30.25 126.54,24.92 134.54,24.92 3V3.TP 134.67,24.79 v140.64,18.82 | v153.59,18.82 164.51,18.82 J3.2 | v131.36,36.22 130.6,36.98 129.97,36.98 C3.+ | 120.82,33.55 113.33,33.55 97.96,48.92 96.31,48.92 R1-PINH1.2 96.19,48.92 92.12,44.86 88.95,44.86 R2-PINH1.2 88.82,44.86 v88.82,48.41 | J4.P4 5.25,90.58 5.76,90.58 11.1,95.91 11.1,98.58 C9.1 11.22,98.7 v12.37,98.7 | 44.88,107.34 28.37,107.34 | 28.37,107.34 28.11,107.34 R_RESET.1 28.37,107.34 | 44.88,107.34 45.13,107.59 R_CHANGE.2 44.88,107.34 | 44.88,107.34 44.88,101.88 50.21,96.54 50.46,96.54 IC1.2 50.59,96.54 51.35,96.54 | 51.35,96.54 56.69,96.54 68.88,108.74 69.26,108.74 R_BOOT.1 | 28.37,107.34 v28.37,106.45 | 87.04,60.22 87.8,59.46 87.8,59.21 U3.2 | 87.04,60.22 85.01,62.25 80.94,62.25 D7.2 80.82,62.25 79.93,62.25 79.29,61.62 78.28,61.62 67.86,72.03 67.86,76.99 R6.2 67.74,77.11 67.1,77.75 63.42,77.75 62.78,77.11 R7.2 62.66,77.11 62.4,77.11 61.77,77.75 58.34,77.75 57.7,77.11 R8.2 57.58,77.11 56.94,77.75 55.8,77.75 55.16,77.11 52.62,77.11 R9.2 52.5,77.11 52.5,77.49 51.61,78.38 51.35,78.38 | 44.62,77.88 50.85,77.88 51.35,78.38 | 44.62,77.88 41.96,77.88 R10.2 | U2.2 9.06,17.42 9.06,17.04 15.16,10.95 23.67,10.95 R1.1 23.8,10.95 v28.88,10.95 | 48.94,24.28 43.86,24.28 43.61,24.03 43.61,23.39 41.7,21.49 41.7,21.23 U1.3 | 48.94,24.28 49.45,23.77 U1.8 49.45,23.65 49.45,22.5 U1.7 | Q2.3 54.27,33.17 v49.7,33.17 48.31,34.57 R_CL1.1 48.18,34.7 48.18,38.63 47.16,39.65 R5.2 47.04,39.77 47.04,41.3 44.62,43.71 44.62,77.88
  Top 0.127: v48.94,30.88 48.94,24.28 | v51.35,93.24 51.35,96.54 | 51.35,78.38 v51.35,78.51 | 87.04,60.22 v87.17,60.35
  Bottom 0.127: v153.59,18.82 v140.64,18.82 131.36,28.09 v131.36,36.22 | v12.37,98.7 20.62,98.7 v28.37,106.45 | 48.94,31.01 48.94,32.41 v49.7,33.17 | 48.94,31.01 v28.88,10.95 | 48.94,31.01 v48.94,30.88 | v51.35,78.51 v51.35,93.24 | v88.82,48.41 88.82,50.7 87.17,52.35 v87.17,60.35
32KHZ  (via drill 0.3)
  Top 0.127: v87.68,45.74 87.68,44.86 R2-PINH1.1 | v89.83,58.83 89.45,58.83 89.2,59.08 U3.1 | v19.35,19.2 17.95,17.8 17.95,17.55 U2.9 | v29.89,23.27 v23.41,23.27
  Bottom 0.127: v89.83,58.83 89.83,48.79 87.68,46.63 v87.68,45.74 52.37,45.74 v29.89,23.27 | v23.41,23.27 v19.35,19.2
DN  (via drill 0.3)
  Top 0.127: J1.A7 163.88,54.51 164.38,54.51 164.64,54.25 164.64,53.75 164.51,53.62 163.88,53.62 J1.B7 163.75,53.49 163.11,53.49 v162.86,53.24 | v154.48,46.25 152.95,46.25 D1.4
  Bottom 0.127: v154.48,46.25 155.88,46.25 v162.86,53.24
DP  (via drill 0.3)
  Top 0.127: 162.99,54.38 163.24,54.13 163.75,54.13 J1.A6 | 162.99,54.38 162.99,54.76 163.24,55.02 163.75,55.02 J1.B6 | v154.48,48.16 152.95,48.16 D1.6 | 162.99,54.38 v162.86,54.25
  Bottom 0.127: v154.48,48.16 156.76,48.16 v162.86,54.25
EPD_3V3  (via drill 0.3)
  Top 0.127: Q2.2 55.42,31.01 64.69,31.01 64.69,30.7 v64.69,23.01 | 65.13,31.11 63.04,34.89 L1.2 | J2.16 77.01,13.99 77.39,13.99 J2.15 77.52,14.12 77.52,14.5 v78.41,15.39 | 91.11,15.26 99.99,15.26 105.96,21.23 EPD_3V3.TP | 91.11,15.26 89.58,15.26 EPD_C5.1 89.45,15.14 v87.93,15.14 | 91.11,15.26 91.11,37.23 90.34,38 88.18,38 86.41,36.22 83.99,36.22 C7.1
  Top 0.152: 65.13,31.11 64.72,30.7 64.69,30.7
  Bottom 0.127: v87.93,15.14 87.8,15.01 83.36,15.01 82.98,15.39 v78.41,15.39 78.41,16.66 72.05,23.01 v64.69,23.01
EPD_3V3_C  (via drill 0.3)
  Top 0.127: v21.25,33.81 20.49,34.57 20.49,34.95 U2.18 | v38.4,33.81 40.3,33.81 41.7,32.41 51.99,32.41 53.39,31.01 Q2.1 53.51,31.01 55.04,32.54 55.04,33.55 54.02,34.57 49.7,34.57 R_CL1.2 49.58,34.7 49.58,39.14 46.02,42.7 46.02,57.43 EPD_3V3_C.TP
  Bottom 0.127: v38.4,33.81 v21.25,33.81
EPD_BUSY  (via drill 0.3)
  Top 0.127: v80.56,13.23 80.56,13.99 J2.9 80.44,14.12 80.44,16.41 v79.93,16.91 | v103.93,4.09 104.95,3.07 EPD_BUSY.TP | v43.35,24.41 43.35,24.03 42.59,23.27 41.19,23.27 40.69,23.77 21.13,23.77 10.33,34.57 10.33,34.95 U2.26
  Bottom 0.127: v80.56,13.23 94.79,13.23 v103.93,4.09 | v43.35,24.41 72.44,24.41 v79.93,16.91
EPD_CS  (via drill 0.3)
  Top 0.127: v77.01,17.42 78.91,15.52 78.91,14.12 J2.12 | 35.99,18.95 v37.51,18.95 | 35.99,18.95 35.48,19.45 22.14,19.45 20.49,17.8 20.49,17.55 U2.11 | v51.48,77.88 51.23,77.62 51.23,77.11 R9.1 51.1,76.99 48.69,74.57 v48.69,41.05 | v62.78,77.88 67.61,82.7 D6.2 67.74,82.7 83.61,66.83 142.69,66.83 EPD_CS.TP | 35.99,18.95 35.99,18.69 v35.73,18.44
  Bottom 0.127: v77.01,17.42 77.01,17.68 72.69,21.99 52.5,21.99 49.45,18.95 v37.51,18.95 | v62.78,77.88 v51.48,77.88 | v35.73,18.44 41.32,24.03 41.45,24.03 48.69,31.27 v48.69,41.05
EPD_DC  (via drill 0.3)
  Top 0.127: v98.6,20.22 99.61,21.23 EPD_DC.TP | J2.11 79.55,13.99 79.55,13.49 v79.8,13.23 79.8,12.22 v79.17,11.58 | v18.46,11.45 12.87,17.04 12.87,17.42 U2.5
  Bottom 0.127: v79.8,13.23 80.44,13.87 92.25,13.87 v98.6,20.22 | v18.46,11.45 27.35,11.45 28.62,10.18 68.37,10.18 69.77,11.58 v79.17,11.58
EPD_RST  (via drill 0.3)
  Top 0.127: v79.93,16.28 79.93,14.12 J2.10 | v42.59,23.9 34.59,31.9 19.35,31.9 16.68,34.57 16.68,34.95 U2.21 16.68,35.08 16.68,35.33 17.95,36.6 19.48,36.6 21.76,38.89 21.76,41.55 23.56,43.35 23.56,44.33 22.86,45.03 21.88,45.03 20.96,44.11 16.41,44.11 16.36,44.06 16.32,44.05 16.29,43.99 16.24,43.94 16.24,43.9 14.59,40.73 13.51,39.65 10.97,39.65 EPD_RST.TP
  Bottom 0.127: v79.93,16.28 79.67,16.28 72.05,23.9 v42.59,23.9
FLASH_CS  (via drill 0.3)
  Top 0.127: D9.2 52.5,82.7 51.35,81.56 44.5,81.56 41.19,78.26 41.19,46.76 45.64,42.31 45.64,39.77 R5.1 45.64,39.65 41.32,35.33 v41.32,33.42 | v41.32,24.54 41.57,24.28 41.57,23.77 U1.1 | v35.35,18.95 35.22,19.07 23.03,19.07 21.76,17.8 21.76,17.55 U2.12
  Bottom 0.127: v41.32,33.42 v41.32,24.54 35.73,18.95 v35.35,18.95
GDR  (via drill 0.3)
  Top 0.127: v81.45,18.18 83.99,15.64 83.99,14.12 J2.2 | v73.71,25.93 R4.1 72.05,26.06 72.05,27.46 70.15,29.36 66.34,29.36 Q3.1
  Bottom 0.127: v73.71,25.93 v81.45,18.18
GND  (via drill 0.3)
  Top 0.127: 89.45,27.2 89.96,27.2 D3.1 89.45,27.2 | 89.45,27.2 88.31,27.2 82.72,32.79 82.72,36.09 C7.2 82.72,36.22 82.72,46.89 85.26,49.43 85.26,49.68 U3.13 85.39,49.81 85.39,50.19 91.23,56.03 | EPD_C9.2 64.82,19.96 69.01,19.96 EPD_C8.2 69.13,19.96 69.77,19.96 70.78,20.98 | 70.78,20.98 70.78,25.93 R4.2 | EPD_C11.2 93.14,12.85 90.6,12.85 89.58,13.87 EPD_C5.2 89.45,13.87 87.17,11.58 85.52,11.58 J2.MP1 85.39,11.58 82.98,11.58 80.94,13.61 J2.8 80.82,14.12 80.82,18.18 | 76.5,17.93 76.5,14.12 J2.17 76.37,13.99 76.37,13.61 v75.61,12.85 | 76.5,17.93 74.85,19.58 EPD_C7.2 74.72,19.71 73.71,19.71 72.44,20.98 70.78,20.98 | 80.82,18.18 79.55,19.45 EPD_C1.2 79.42,19.45 77.9,17.93 76.5,17.93 | 80.82,18.18 81.83,19.2 84.12,19.2 EPD_C2.2 84.25,19.2 84.5,18.95 88.69,18.95 EPD_C6.2 88.82,18.95 89.45,19.58 89.45,27.2 | C2.2 142.41,6.25 142.41,7.64 144.95,10.18 SENSOR2.1 145.08,10.31 146.86,10.31 147.62,11.07 147.87,11.07 SENSOR2.7 | 148.13,11.07 148,11.2 SENSOR2.7 | 148.13,11.07 151.56,7.64 151.56,6.25 C1.2 151.68,6.12 164.11,6.12 GND2ND.TP 164.28,6.45 164.28,12.16 GND.TP 164.64,13.77 164.64,17.68 J3.1 164.64,17.8 165.02,17.8 165.53,18.31 165.53,49.17 | 148.13,11.07 148.64,11.58 148.64,12.22 148.26,12.6 148,12.6 SENSOR2.5 | 148.13,11.07 SENSOR2.7 | C5_USB.2 153.34,42.31 153.34,44.09 R2-USB1.1 153.34,44.22 152.19,45.36 152.06,45.36 151.3,46.12 151.3,46.63 150.8,47.14 | D1.2 150.41,47.14 150.16,47.14 149.53,47.78 148,47.78 C4_USB.2 147.87,47.9 129.46,47.9 126.41,50.95 126.41,52.35 126.92,52.86 | 150.8,47.14 151.3,47.65 151.3,48.03 155.11,51.84 155.88,51.84 R2-USB.2 156,51.97 157.91,51.97 163.24,57.3 163.75,57.3 J1.B1 163.88,57.43 163.88,57.55 J1.A12 163.88,57.68 163.88,58.83 164.38,59.33 J1.MP4 164.51,59.46 168.32,59.46 J1.MP2 168.32,59.33 168.32,49.3 J1.MP1 168.32,49.17 165.53,49.17
  Top 0.127: 150.8,47.14 150.54,47.14 D1.2 | 150.8,47.14 D1.2 | J1.B12 163.88,51.2 163.88,50.95 J1.A1 163.88,50.82 163.88,49.81 164.38,49.3 J1.MP3 164.51,49.17 165.53,49.17 | C1_BAT1.2 114.09,35.97 116.89,35.97 R1_PWRUSB.1 117.01,35.84 117.65,35.84 | 122.35,34.06 122.35,30.38 C1_BAT2.2 | 122.35,34.06 123.49,35.2 IC4.2 123.62,35.08 125.14,35.08 126.16,34.06 129.84,34.06 C3.- | 117.65,35.84 119.81,35.84 120.95,34.7 121.71,34.7 122.35,34.06 | 126.41,53.36 126.41,54.13 126.54,54.25 126.54,58.44 C1_BAT.2 | 126.92,52.86 126.41,53.36 | 126.92,52.86 127.17,52.86 MCP73831.2 126.92,52.86 | 126.41,53.36 126.16,53.11 120.82,53.11 C2_BAT.2 120.7,53.11 120.57,53.24 116.38,53.24 R2_BAT.1 116.25,53.24 112.82,53.24 | 91.23,56.03 91.23,63.27 C8.2 | 91.23,56.03 96.19,51.08 100.12,51.08 C10_SUPERCAP.1 100.25,51.08 102.41,53.24 112.82,53.24 | 117.65,35.84 117.65,34.19 117.27,33.81 113.46,33.81 112.82,34.44 112.82,53.24 | BOOT_BUTTON.2 65.96,107.59 62.66,107.59 BOOT_BUTTON.1 62.53,107.47 60.37,107.47 C6.2 60.24,107.47 53.77,107.47 53.64,107.59 C10.2 53.51,107.59 51.1,107.59 CHANGE_BUTTON.2 | C_DELAY.2 55.04,97.18 54.91,97.31 50.59,97.31 IC1.3 50.46,107.59 | 50.46,107.59 50.97,107.59 CHANGE_BUTTON.2 | 50.46,107.59 47.54,107.59 CHANGE_BUTTON.1 47.42,107.59 46.4,107.59 45.77,108.23 44.62,108.23 44.37,107.97 v28.88,107.97 | 50.46,107.59 CHANGE_BUTTON.2 | 17.7,83.34 15.79,85.24 J4.G1 15.79,85.37 16.56,86.13 16.56,89.18 15.79,89.94 15.79,90.96 J4.G2 15.67,91.08 15.67,92.1 12.87,94.89 12.87,98.83 11.48,100.23 | 17.7,83.34 18.21,82.83 28.11,82.83 D12.1 | C9.2 11.1,99.85 6.9,99.85 2.59,95.53 J4.G4 2.59,95.4 2.59,95.15 4.62,93.12 4.75,93.12 5.13,92.73
  Top 0.127: 5.13,92.73 1.57,89.18 1.57,82.45 J4.G3 | 5.13,92.73 J4.P6 | 11.48,100.23 11.22,99.97 C9.2 | 11.48,100.23 18.46,107.21 20.24,107.21 C5.2 22.53,107.34 RESET_BUTTON.1 22.65,107.34 26.08,107.34 RESET_BUTTON.2 26.21,107.34 v27.1,106.45 | 11.48,100.23 C9.2 | 71.93,11.58 69.9,11.58 68.88,12.6 EPD_C12.2 68.75,12.6 67.74,11.58 65.58,11.58 EPD_C10.2 65.45,11.45 62.91,8.91 58.85,8.91 58.21,9.55 R2.2 58.08,9.68 58.08,11.83 57.96,11.96 SJ1.1 57.83,12.09 56.31,12.09 46.65,21.74 45.64,21.74 U1.9 45.51,21.74 43.73,19.96 41.7,19.96 U1.4 41.57,19.96 18.21,19.96 14.78,23.39 U2.29_7 | U2.29_7 14.78,23.52 14.78,24.66 U2.29_8 14.78,24.79 14.78,25.93 U2.29_9 14.65,26.06 13.51,26.06 U2.29_6 13.38,26.06 12.24,26.06 U2.29_3 12.11,26.06 7.79,30.38 7.79,34.95 U2.28 7.79,35.08 7.79,39.14 15.67,47.01 15.67,52.73 U4.4 | 12.24,23.52 12.24,24.66 U2.29_2 | 13.51,23.52 13.51,24.66 U2.29_5 | 12.24,23.52 13.38,23.52 U2.29_4 13.51,23.52 | 12.24,23.52 U2.29_1 12.11,23.39 10.59,23.39 7.79,20.6 7.79,17.55 U2.1 | 13.51,23.52 14.65,23.52 U2.29_7 | 16.68,53.36 16.81,53.49 U4.9 | 16.68,53.36 16.18,52.86 15.79,52.86 U4.4 | U4.1 15.79,54.25 16.05,54.25 16.68,53.62 U4.9 | 16.68,53.36 17.57,53.36 U4.6 | 16.68,53.36 U4.9 | 17.7,83.34 16.68,82.32 16.68,56.41 14.78,54.51 14.78,53.36 15.29,52.86 15.67,52.86 U4.4 | 71.93,11.58 v72.94,12.6 | 71.93,11.58 J2.MP2
  Bottom 0.127: v28.88,107.97 28.62,107.97 v27.1,106.45 | v75.61,12.85 74.47,12.85 74.21,12.6 v72.94,12.6
GPIO8
  Top 0.127: R1.2 23.67,12.22 23.67,12.6 19.22,17.04 19.22,17.42 U2.10
I2C_PW
  Top 0.127: 147.49,4.85 145.72,4.85 R2-PINH.1 145.59,4.85 C2.1 142.29,4.85 142.29,5.1 141.65,5.74 141.65,10.82 | 147.49,4.85 148.13,4.85 R1_PINH.1 148.26,4.85 151.56,4.85 C1.1 | 147.49,4.85 147.49,9.42 147.87,9.8 147.87,10.18 SENSOR2.8 | SENSOR2.6 147.87,11.83 147.62,11.83 146.86,11.07 145.08,11.07 SENSOR2.2 144.95,11.07 144.7,10.82 141.65,10.82 | 141.65,10.82 75.36,10.82 72.94,13.23 68.37,13.23 49.45,32.16 24.18,32.16 21.76,34.57 21.76,34.95 U2.17
INT_RTC  (via drill 0.3)
  Top 0.127: v95.3,50.32 96.19,50.32 R1-PINH1.1 | v95.3,56.28 96.95,57.94 INT_RTC.TP 96.95,58.06 96.95,58.7 91.74,63.91 90.72,63.91 90.6,63.78 90.6,58.95 89.45,57.81 87.55,57.81 86.66,58.7 86.66,59.08 U3.3 | v40.94,19.45 40.69,19.71 18.59,19.71 16.68,17.8 16.68,17.55 U2.8
  Bottom 0.127: v95.3,56.28 v95.3,50.32 95.3,42.57 80.56,27.84 80.56,20.6 81.96,19.2 81.96,18.06 81.71,17.8 81.71,17.42 80.06,15.77 79.8,15.77 72.05,23.52 53.64,23.52 49.58,19.45 v40.94,19.45
IO/BOOT
  Top 0.127: C6.1 60.37,108.74 62.4,108.74 62.53,108.86 BOOT_BUTTON.4 62.66,108.99 65.96,108.99 BOOT_BUTTON.3 66.09,108.99 66.47,109.37 69.9,109.37 70.02,109.24 70.02,108.23 69.39,107.59 R_BOOT.2 69.26,107.47 56.94,95.15 53.89,95.15 24.3,65.56 24.3,35.08 U2.15
IO/CHANGE  (via drill 0.3)
  Top 0.127: C10.1 53.51,108.99 51.1,108.99 CHANGE_BUTTON.3 50.97,109.12 47.54,109.12 CHANGE_BUTTON.4 47.42,108.99 45.26,108.99 R_CHANGE.1 45.13,108.86 44.75,108.48 v44.24,108.48 | v14.14,37.49 14.14,37.19 16.62,38.93 16.6,38.95 16.6,39.93 17.3,40.63 18.28,40.63 18.98,39.93 18.98,38.95 18.28,38.25 17.15,38.25 14.14,35.24 14.14,35.04 U2.23
  Bottom 0.127: v14.14,37.49 14.14,78.38 v44.24,108.48
MISO  (via drill 0.3)
  Top 0.127: U1.2 41.57,22.5 21.13,22.5 9.06,34.57 9.06,34.95 U2.27 9.06,35.08 9.06,40.03 24.05,55.02 24.05,74.57 v30.91,81.43 29.64,82.7 D12.2 29.51,82.83 v18.59,93.75 | v56.31,75.84 56.31,76.99 R8.1 | v64.94,67.21 64.94,62.64 MISO.TP | v8.3,93.75 5.38,93.75 J4.P7
  Bottom 0.127: v64.94,67.21 v56.31,75.84 52.5,75.84 46.91,81.43 v30.91,81.43 | v18.59,93.75 v8.3,93.75
MOSI  (via drill 0.3)
  Top 0.127: v74.21,13.23 75.1,12.34 76.63,12.34 77.9,13.61 77.9,13.99 J2.14 | v61.01,13.74 55.67,13.74 49.58,19.84 U1.5 49.45,19.96 49.45,20.22 48.81,20.85 48.81,21.49 49.32,21.99 49.96,21.99 v52.88,24.92 | v56.94,11.58 20.87,11.58 15.41,17.04 15.41,17.42 U2.7 | 61.26,75.34 61.26,63.91 59.99,62.64 MOSI.TP 59.86,62.51 52.88,55.52 v52.88,43.58 | 61.26,75.34 61.26,76.99 R7.1 | v39.03,80.92 37.26,82.7 D11.2 37.13,82.7 36.49,82.07 35.22,82.07 27.99,89.31 v24.43,89.31 | 61.26,75.34 v52.62,75.34 | v14.78,89.31 5.38,89.31 J4.P3
  Bottom 0.127: v74.21,13.23 73.71,13.74 v61.01,13.74 61.01,12.98 59.61,11.58 v56.94,11.58 | v39.03,80.92 47.04,80.92 v52.62,75.34 | v24.43,89.31 v14.78,89.31 | v52.88,43.58 v52.88,24.92
N$1  (via drill 0.3)
  Top 0.127: v48.56,95.66 47.67,95.66 IC1.5 | v54.27,95.66 54.91,95.66 55.04,95.78 C_DELAY.1
  Bottom 0.127: v54.27,95.66 v48.56,95.66
N$3
  Top 0.127: C1_BAT1.1 113.97,34.82 113.33,35.46 113.33,36.35 113.58,36.6 122.98,36.6 123.49,36.09 IC4.3 123.62,35.97 128.57,35.97 128.82,35.71 133.4,35.71 | IC4.1 123.62,34.06 125.78,34.06 127.05,32.79 132.89,32.79 134.29,34.19 D2.1 134.29,34.31 133.4,35.2 133.4,35.71 | 133.4,35.71 133.4,40.03 Q1.2
N$4  (via drill 0.3)
  Top 0.127: D6.1 66.21,82.83 65.58,83.46 59.35,83.46 58.72,82.83 D8.1 58.59,82.83 54.27,82.83 53.39,83.72 51.73,83.72 51.1,83.08 51.1,82.83 D9.1 50.97,82.7 46.4,82.7 45.77,82.07 44.11,82.07 43.48,82.7 D10.1 43.35,82.83 v42.21,82.83 | v41.57,83.46 36.49,83.46 35.86,82.83 D11.1
  Bottom 0.127: v42.21,82.83 v41.57,83.46
N$6
  Top 0.127: R2-USB1.2 152.19,44.09 152.19,43.2 152.7,42.7 152.7,41.68 152.83,41.55 153.84,41.55 154.1,41.81 154.1,44.6 153.08,45.62 152.19,45.62 152.06,45.74 152.06,48.41 153.59,49.94 160.19,49.94 163.24,52.98 163.75,52.98 J1.A5
N$8
  Top 0.127: R2-USB.1 156,50.7 157.91,50.7 163.24,56.03 163.75,56.03 J1.B5
N$15  (via drill 0.3)
  Top 0.127: v81.96,17.04 82.22,17.04 82.98,16.28 82.98,14.12 J2.4 | v81.07,20.73 79.55,20.73 EPD_C1.1
  Bottom 0.127: v81.96,17.04 81.96,17.68 82.22,17.93 82.22,19.58 v81.07,20.73
N$16
  Top 0.127: D7.1 78.91,62.38 79.67,62.38 80.82,63.52 85.52,63.52 R_CAPACITOR.2
N$19  (via drill 0.3)
  Top 0.127: v82.47,16.15 82.47,14.12 J2.5 | v82.98,19.71 83.36,19.71 84.12,20.47 EPD_C2.1
  Bottom 0.127: v82.47,16.15 82.47,19.2 v82.98,19.71
N$28  (via drill 0.3)
  Top 0.127: v75.99,14.88 75.99,14.12 J2.18 | v88.06,19.45 88.69,20.09 EPD_C6.1
  Bottom 0.127: v75.99,14.88 83.1,14.88 83.36,14.63 88.06,14.63 88.44,15.01 88.44,19.07 v88.06,19.45
N$29  (via drill 0.3)
  Top 0.127: v74.85,15.39 74.85,14.12 J2.20 | v69.77,20.6 69.13,21.23 EPD_C8.1
  Bottom 0.127: v74.85,15.39 69.77,20.47 v69.77,20.6
N$30
  Top 0.127: J2.19 75.36,14.12 75.36,15.52 71.55,19.33 64.31,19.33 64.05,19.58 64.05,21.74 69.01,26.69 71.29,26.69 71.55,26.44 71.55,24.15 74.72,20.98 EPD_C7.1
N$32  (via drill 0.3)
  Top 0.127: v73.58,13.23 73.83,13.49 73.83,13.99 J2.22 | v66.34,13.23 65.96,13.23 65.58,12.85 EPD_C10.1
  Bottom 0.127: v66.34,13.23 v73.58,13.23
N$34
  Top 0.127: J2.24 72.82,13.99 68.88,13.99 EPD_C12.1
N$35  (via drill 0.3)
  Top 0.127: v89.83,32.79 89.83,37.23 C4.1 | D3.2 86.53,27.2 86.91,27.58 v86.91,27.96 77.77,37.11 77.77,39.59 D4.1
  Bottom 0.127: v89.83,32.79 89.83,30.88 v86.91,27.96
N$36
  Top 0.127: CHG_LED.C 129.71,55.9 129.71,51.97 130.35,51.33 130.35,50.19 129.71,49.55 R1_BAT.2
N$37
  Top 0.127: R1_BAT.1 129.59,50.82 128.32,50.82 127.3,51.84 MCP73831.1
N$38
  Top 0.127: R2_BAT.2 116.38,51.97 124.51,51.97 MCP73831.5
PREVGH  (via drill 0.3)
  Top 0.127: v70.15,18.82 74.34,14.63 74.34,14.12 J2.21 | v67.74,21.23 64.82,21.23 EPD_C9.1 | v83.99,12.72 90.85,19.58 90.85,27.58 90.09,28.34 90.09,31.9 D5.1
  Bottom 0.127: v67.74,21.23 v70.15,18.82 70.15,17.55 73.58,14.12 74.98,14.12 76.37,12.72 v83.99,12.72
PREVGL  (via drill 0.3)
  Top 0.127: 73.33,14.5 73.33,14.12 J2.23 | 73.33,14.5 68.75,19.07 64.18,19.07 54.66,28.6 54.66,31.72 63.82,40.89 76.6,40.89 D4.2 | v90.47,14.38 90.6,14.25 93.14,14.25 EPD_C11.1 | 73.33,14.5 v73.58,14.76
  Bottom 0.127: v90.47,14.38 73.96,14.38 v73.58,14.76
RESE  (via drill 0.3)
  Top 0.127: v83.48,15.52 83.48,14.12 J2.3 | v83.48,25.3 82.85,25.93 R3.1 82.85,26.06 80.82,28.09 v80.18,28.09 | v70.78,28.09 66.34,28.09 Q3.2
  Bottom 0.127: v83.48,25.3 v83.48,15.52 | v80.18,28.09 v70.78,28.09
RESE'  (via drill 0.3)
  Top 0.127: R2.1 59.48,9.68 59.48,11.96 SJ1.2 59.48,12.09 v60.5,13.1 | v73.71,20.34 75.23,20.34 80.82,25.93 81.45,25.93 R3.2
  Bottom 0.127: v73.71,20.34 70.66,20.34 69.26,21.74 67.61,21.74 60.5,14.63 v60.5,13.1
RESET  (via drill 0.3)
  Top 0.127: C5.1 20.37,108.74 22.53,108.74 RESET_BUTTON.4 22.65,108.86 26.08,108.86 RESET_BUTTON.3 26.21,108.74 26.34,108.61 27.35,108.61 | 27.35,108.61 27.99,108.61 R_RESET.2 | 27.35,108.61 27.35,106.83 v37.26,96.92 47.92,96.92 49.2,95.66 50.46,95.66 IC1.1 | v10.33,20.85 10.33,17.55 U2.3
  Bottom 0.127: v10.33,20.85 10.33,33.04 15.67,38.38 15.67,75.34 v37.26,96.92
RTC_RST  (via drill 0.3)
  Top 0.127: v23.8,36.09 23.03,35.33 23.03,35.08 U2.16 | v59.61,55.65 61.77,57.81 84.37,57.81 85.26,58.7 85.26,59.08 U3.4
  Bottom 0.127: v23.8,36.09 40.05,36.09 v59.61,55.65
RX
  Top 0.127: U2.24 12.87,35.08 12.87,35.99 RX.TP
SCK  (via drill 0.3)
  Top 0.127: v63.42,77.11 66.34,77.11 R6.1 | v45.89,82.83 44.88,82.83 D10.2 | v16.18,75.21 15.92,75.21 4.11,87.02 4.11,90.83 4.75,91.46 5.25,91.46 J4.P5 | v79.17,12.22 78.53,12.85 78.53,13.99 J2.13 | v98.85,4.09 99.87,3.07 SCK.TP | v67.99,12.72 59.61,21.11 49.58,21.11 U1.6 | v19.22,11.96 14.14,17.04 14.14,17.42 U2.6
  Bottom 0.127: v63.42,77.11 51.61,77.11 v45.89,82.83 45.38,82.32 30.4,82.32 23.29,75.21 17.95,75.21 | 17.95,75.21 v16.18,75.21 | v98.85,4.09 90.72,12.22 v79.17,12.22 79.04,12.09 72.82,12.09 72.18,12.72 v67.99,12.72 65.7,10.44 28.75,10.44 27.22,11.96 v19.22,11.96 17.95,13.23 17.95,75.21
SCL  (via drill 0.3)
  Top 0.127: v18.46,53.36 18.08,53.75 17.7,53.75 U4.7 | v18.46,36.09 18.46,35.58 17.95,35.08 U2.20 | v145.59,9.68 145.59,6.25 R2-PINH.2 | SENSOR2.4 145.08,12.6 145.33,12.6 145.72,12.22 v145.97,12.22 154.48,20.73 164.51,20.73 J3.4 | v97.33,49.68 89.2,49.68 U3.16 | v90.72,56.16 v60.75,56.16
  Bottom 0.127: v18.46,36.09 v18.46,53.36 21.25,56.16 v60.75,56.16 | v145.59,9.68 145.59,11.33 145.46,11.45 145.46,11.71 | v145.97,12.22 145.46,11.71 | 145.46,11.71 107.49,49.68 v97.33,49.68 97.33,54.89 95.42,56.79 95.17,56.79 94.53,56.16 v90.72,56.16
SDA  (via drill 0.3)
  Top 0.127: v19.1,53.36 18.21,54.25 17.7,54.25 U4.8 | v19.1,36.09 19.1,35.08 U2.19 | v148.13,9.42 148.13,6.12 R1_PINH.2 | J3.3 164.51,19.71 153.84,19.71 146.48,12.34 146.48,12.09 v145.97,11.58 145.33,11.58 145.08,11.83 SENSOR2.3 144.95,11.96 120.57,11.96 88.31,44.22 | 88.31,44.22 88.31,45.74 87.93,46.12 87.93,49.68 U3.15 | 88.31,44.22 v88.18,44.09
  Bottom 0.127: v19.1,53.36 v19.1,36.09 19.1,28.22 23.92,23.39 23.92,19.33 23.29,18.69 23.29,18.44 23.67,18.06 25.32,18.06 48.18,40.92 48.18,41.17 51.1,44.09 v88.18,44.09 | v145.97,11.58 v148.13,9.42
SRC  (via drill 0.3)
  Top 0.127: C4.2 88.56,37.23 88.56,34.06 86.53,32.03 D5.2 86.41,32.03 v84.12,32.03 | 75.61,28.09 73.33,28.09 71.42,30 65.83,30 65.58,29.74 65.58,29.11 65.83,28.85 68.37,28.85 Q3.3 | v79.55,32.03 75.61,28.09 | L1.1 67.62,32.25 72.31,27.56 75.08,27.56 75.61,28.09
  Bottom 0.127: v79.55,32.03 v84.12,32.03
SS_SD  (via drill 0.3)
  Top 0.127: D8.2 59.99,82.7 59.35,82.07 54.66,82.07 53.26,83.46 51.86,83.46 51.73,83.34 51.73,82.32 51.23,81.81 44.37,81.81 40.69,78.13 40.69,77.88 R10.1 40.56,77.88 v37.26,77.88 | v9.83,21.99 11.48,20.34 11.48,17.55 U2.4 | v9.83,84.1 5.76,88.16 J4.P2 | v26.59,77.88 21.38,77.88 v17.19,82.07
  Bottom 0.127: v9.83,84.1 9.83,82.07 | 9.83,82.07 v9.83,21.99 | v26.59,77.88 v37.26,77.88 | 9.83,82.07 v17.19,82.07
TX
  Top 0.127: U2.25 11.6,35.08 11.6,37.36 14.78,40.54 16.49,43.84 TX.TP
USB_D+  (via drill 0.3)
  Top 0.127: v129.21,48.79 148.13,48.79 148.76,48.16 150.41,48.16 D1.1 | v24.56,18.57 24.56,17.8 24.3,17.55 U2.14
  Bottom 0.127: v129.21,48.79 108.76,48.79 96.69,60.86 66.85,60.86 v24.56,18.57
USB_D-  (via drill 0.3)
  Top 0.127: v148.76,46.25 150.41,46.25 D1.3 | v23.8,18.57 23.03,17.8 23.03,17.55 U2.13
  Bottom 0.127: v148.76,46.25 132.38,46.25 127.43,51.2 106.73,51.2 96.82,61.11 66.34,61.11 v23.8,18.57
VBAT  (via drill 0.3)
  Top 0.127: U4.3 15.79,53.36 15.79,53.75 U4.2 15.67,53.87 15.29,53.87 15.03,54.13 15.03,54.38 v22.02,61.36 | 128.7,57.94 126.92,59.71 119.05,59.71 118.28,58.95 118.28,57.94 120.7,55.52 120.7,54.38 C2_BAT.1 | 128.7,57.94 128.7,55.27 127.3,53.87 | v132.25,47.39 132.25,42.19 Q1.3 | 127.3,53.87 v128.19,52.98 | 127.3,53.87 MCP73831.3 | 128.7,57.94 129.52,58.75 VBAT.TP
  Bottom 0.127: v132.25,47.39 132.25,48.92 v128.19,52.98 119.81,61.36 v22.02,61.36
VBUS  (via drill 0.3)
  Top 0.127: 154.99,47.14 155.49,47.14 155.62,47.27 PFMF.050.1.2 154.99,47.14 | 154.99,47.14 152.95,47.14 D1.5 | 154.99,47.14 154.99,42.31 153.97,41.3 152.7,41.3 152.06,41.93 152.06,42.19 C5_USB.1 151.94,42.31 148,46.25 148,46.51 C4_USB.1 147.87,46.51 140.51,46.51 134.29,40.28 | CHG_LED.A 128.06,56.03 128.06,58.19 127.05,59.21 126.03,59.21 125.39,58.57 C1_BAT.1 125.27,58.44 124.63,57.81 | 124.63,57.81 124.63,53.87 MCP73831.4 124.63,53.75 v125.65,53.75 | 124.63,57.81 124.12,58.32 119.55,58.32 VBUS.TP | 125.65,40.03 131.36,40.03 Q1.1 131.49,40.16 132.13,40.79 133.78,40.79 134.29,40.28 | 125.65,40.03 116.63,40.03 113.08,36.47 113.08,34.57 113.58,34.06 114.6,34.06 115.11,34.57 116.89,34.57 R1_PWRUSB.2 | 134.29,40.28 D2.2 | 125.65,40.03 v125.65,51.71
  Bottom 0.127: v125.65,51.71 v125.65,53.75
VRTC  (via drill 0.3)
  Top 0.127: 88.56,64.92 90.98,64.92 91.23,64.67 C8.1 | 88.56,64.92 85.64,64.92 R_CAPACITOR.1 | 88.56,51.08 87.55,51.08 86.66,50.19 86.66,49.81 U3.14 | 88.56,51.08 89.45,51.08 89.71,50.82 96.82,50.82 98.72,48.92 100.12,48.92 C10_SUPERCAP.2 | v88.56,60.35 88.56,64.92 | 88.56,51.08 v88.56,51.59
  Bottom 0.127: v88.56,51.59 v88.56,60.35
VUSB
  Top 0.127: J1.A9 163.88,56.79 163.88,56.67 J1.B4 163.88,56.54 164.38,56.54 164.89,56.03 164.89,52.6 164.38,52.09 163.88,52.09 J1.B9 163.88,51.97 163.88,51.84 J1.A4 163.75,51.71 163.24,51.71 160.19,48.67 160.19,47.39 PFMF.050.1.1